# Altium PCB DC_Buck_5V.PcbDoc
Units mm, origin at the board's own origin, x right, y up, seen from the top; angles counter-clockwise.
Board outline 250 x 250 mm, 2 copper layers (Top Layer, Bottom Layer); 37 components, 22 nets, 92 pads, 116 vias.
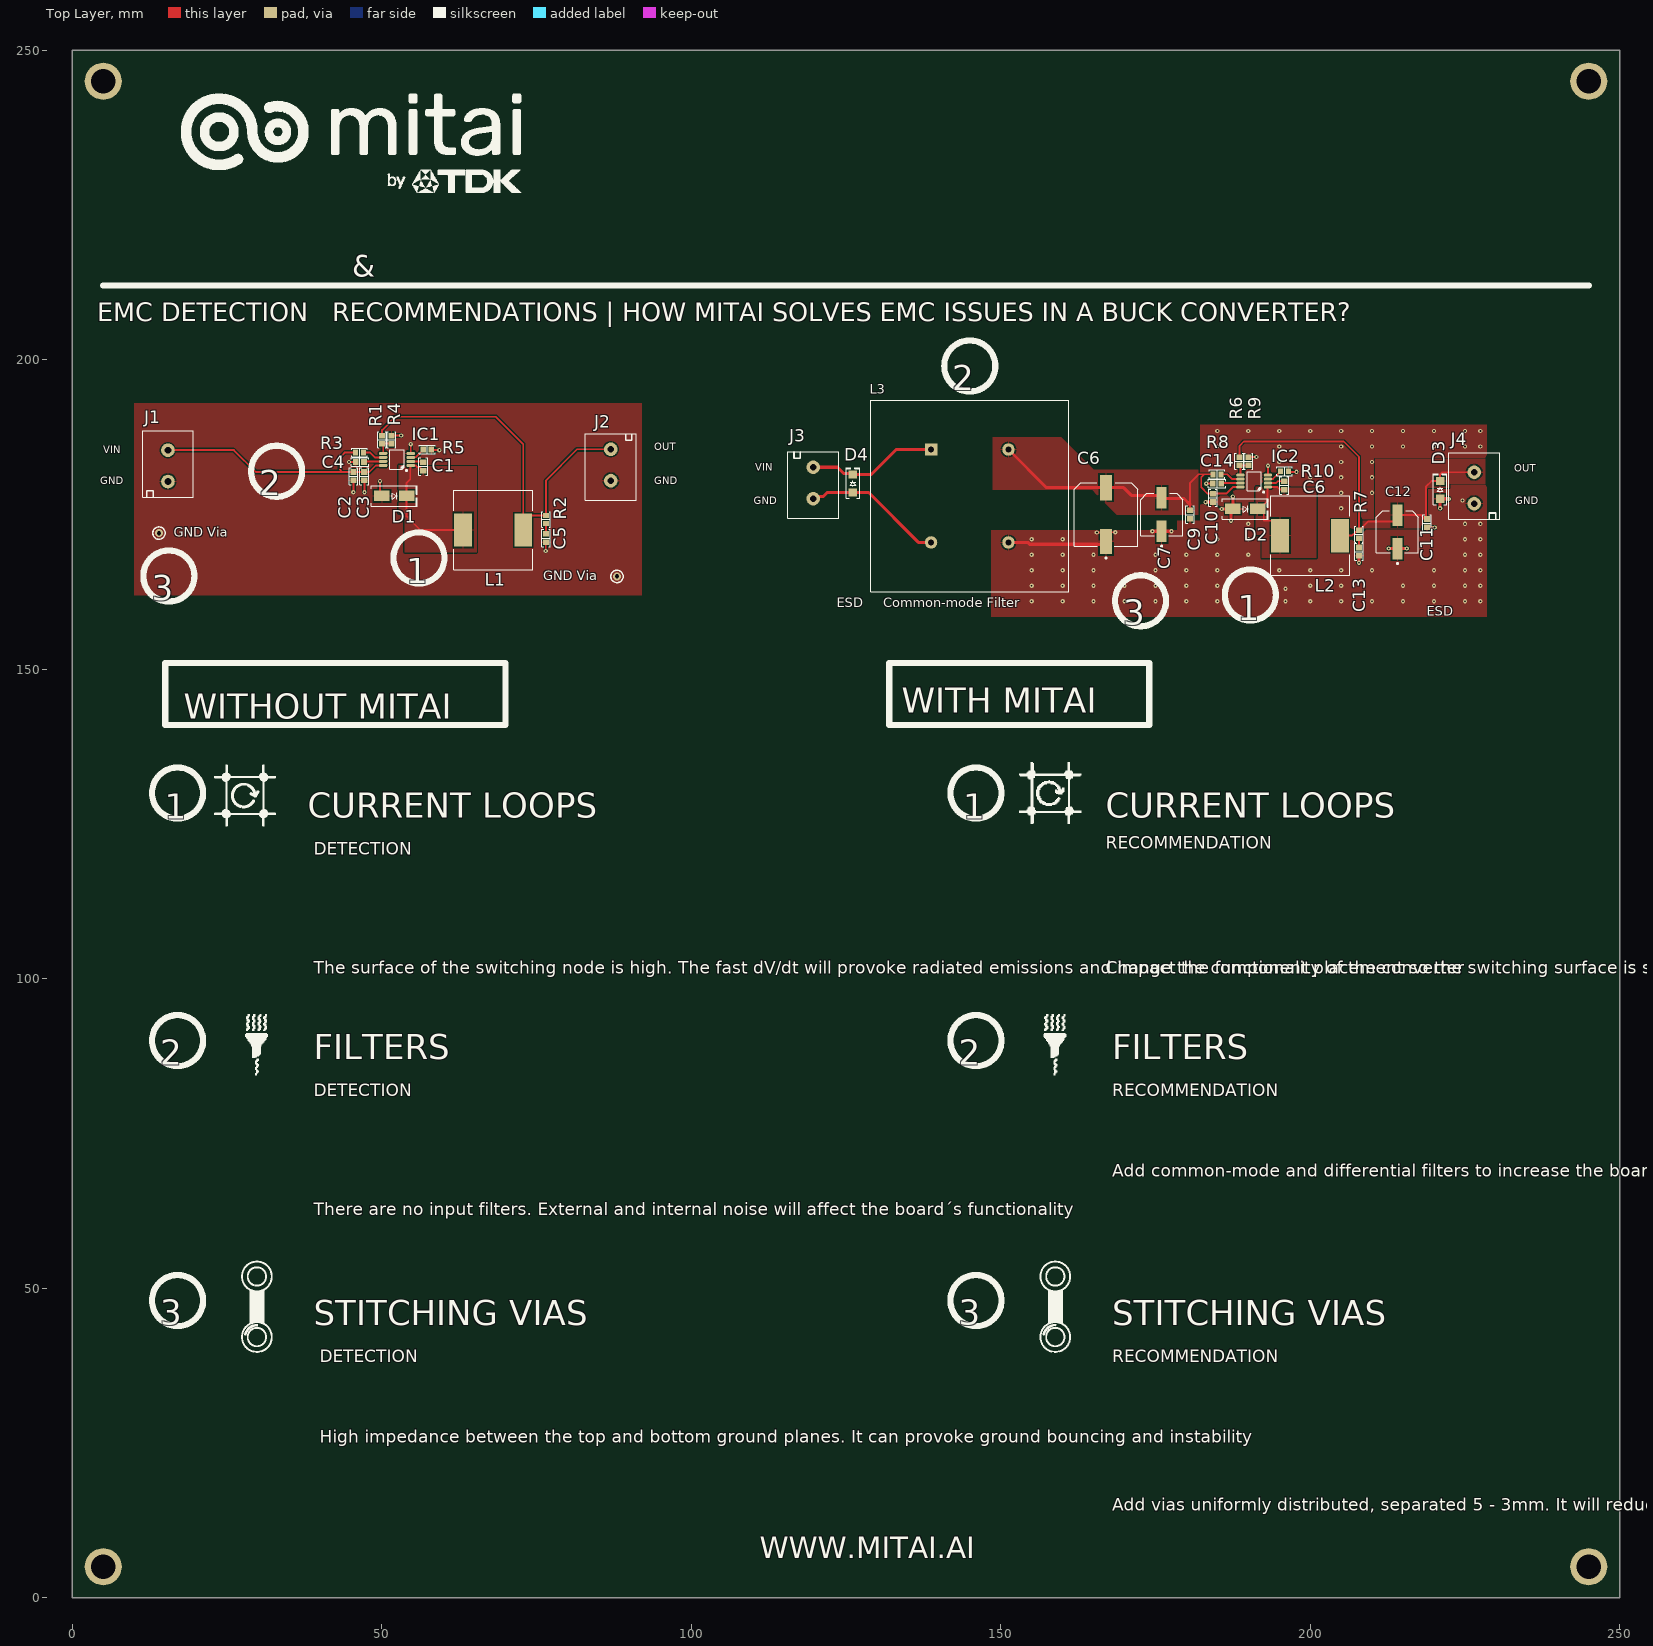
[diagram p0: Top Layer view]
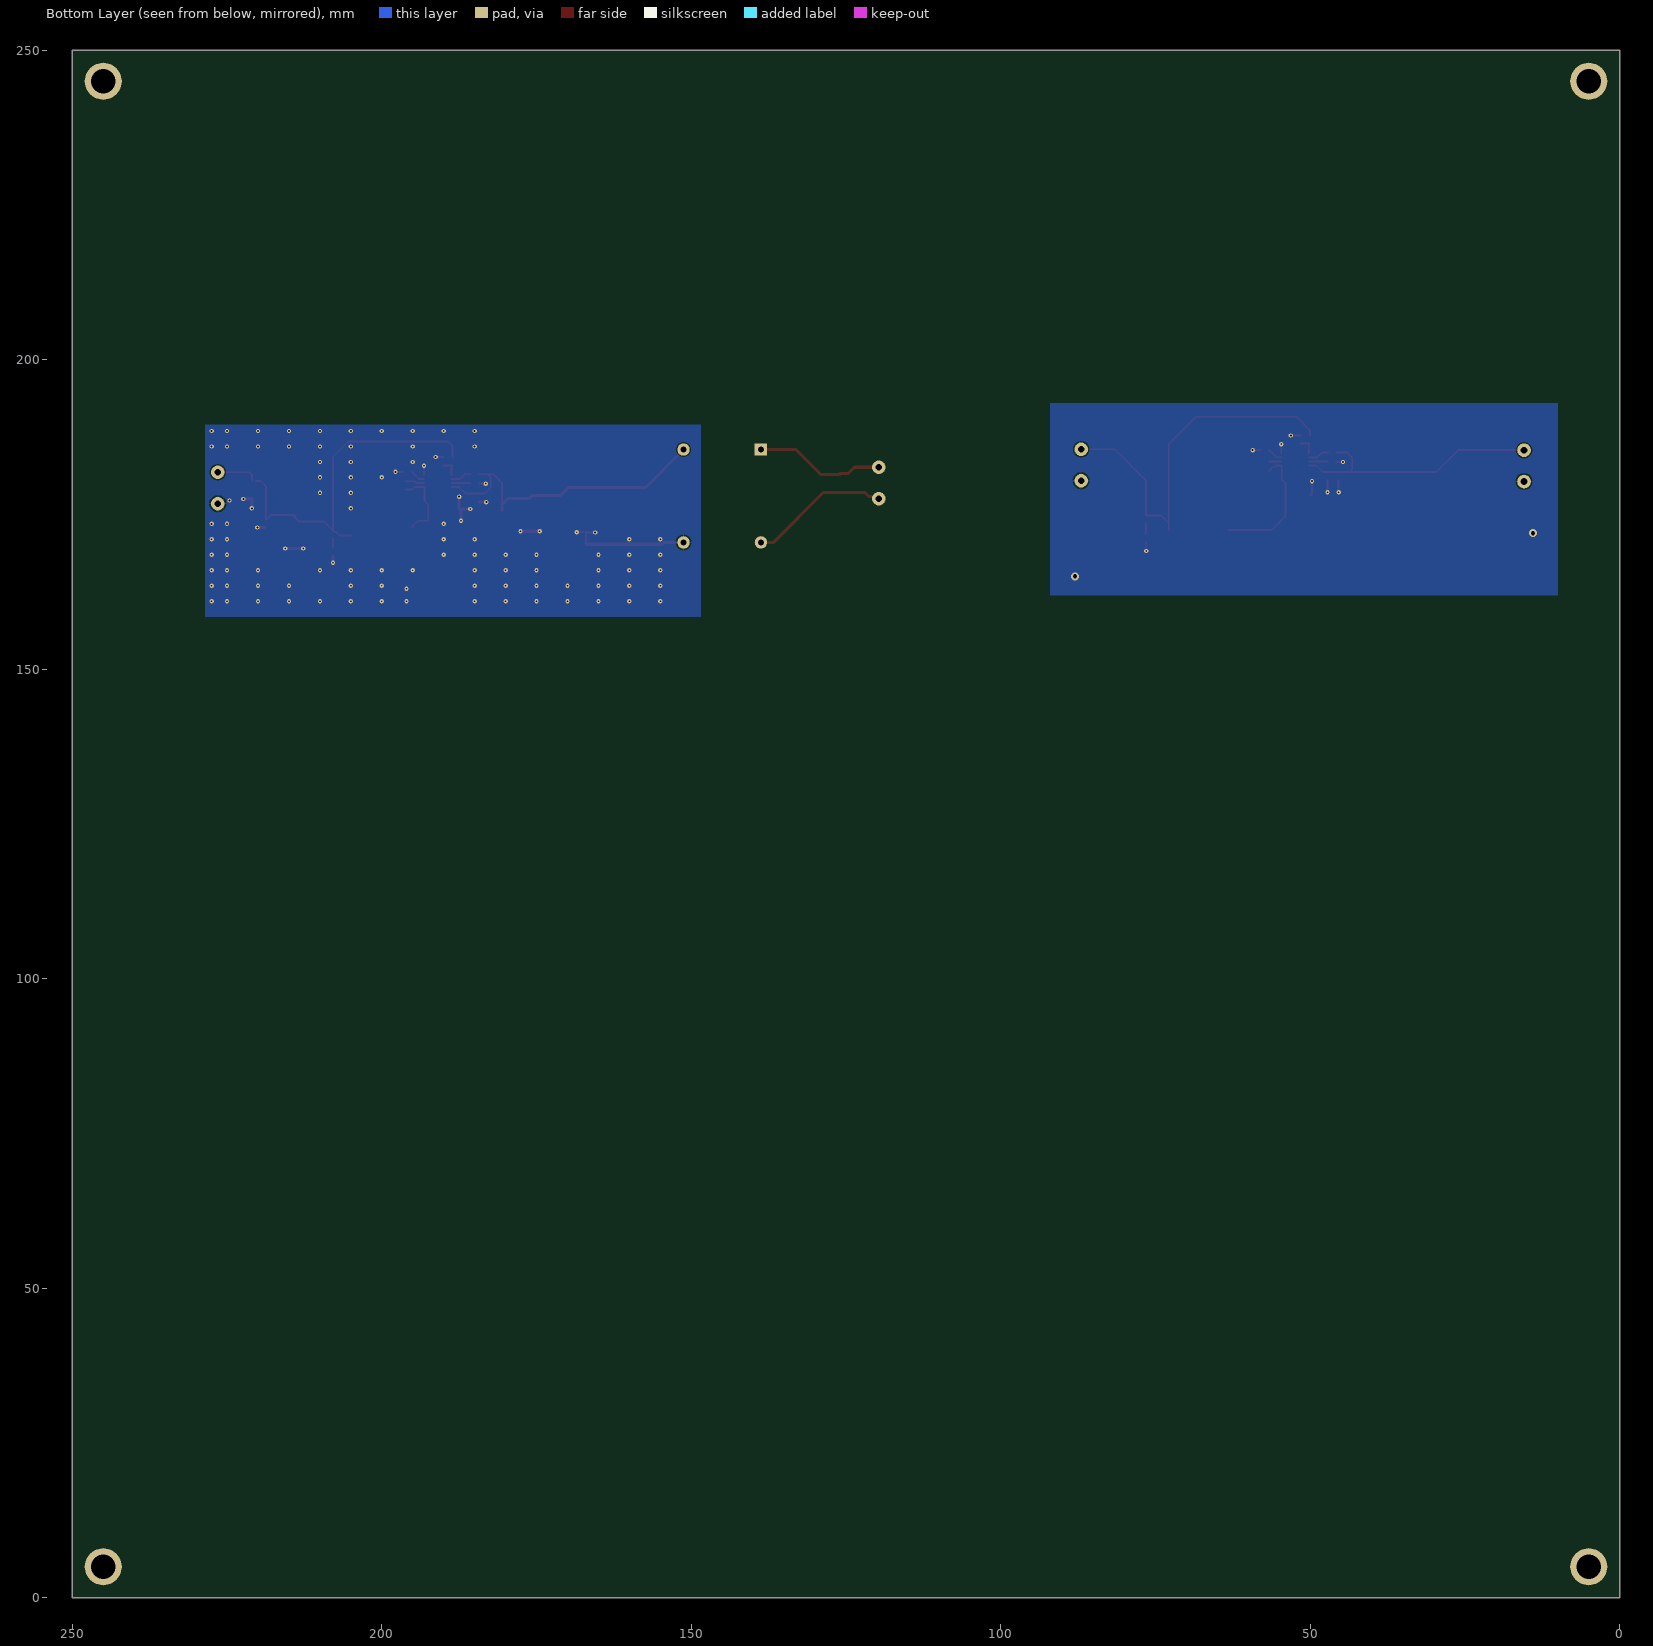
[diagram p1: Bottom Layer view, seen from below]
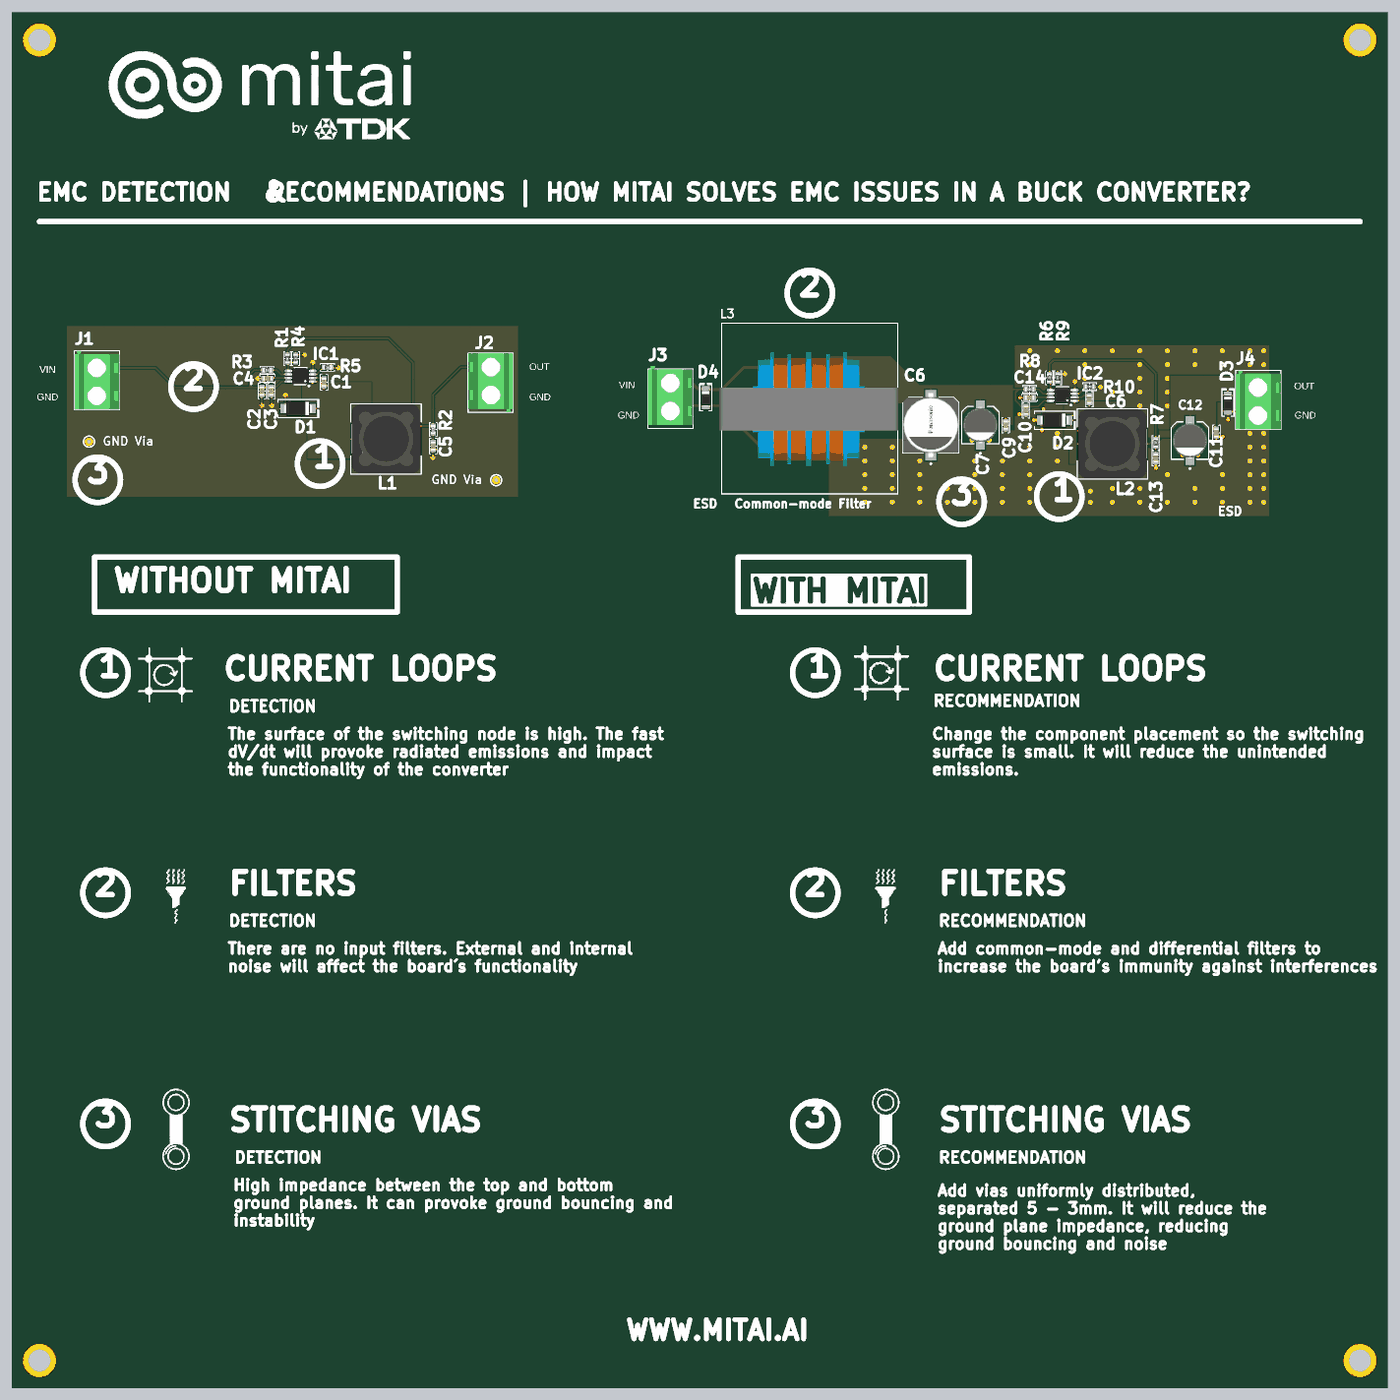
[diagram p2: 3D render of the assembled board from above, using the file's embedded part models]

## Layer stack, top to bottom
Top Solder: solder mask 0.0102, Solder Resist, Dk 3.5
Top Layer: signal copper 0.0356
Dielectric 1: dielectric 0.32, FR-4, Dk 4.8
Bottom Layer: signal copper 0.0356
Bottom Solder: solder mask 0.0102, Solder Resist, Dk 3.5

## Board outline
0,0 250,0 250,250 0,250

## Design rules (kind name [scope] priority, off if disabled: settings)
Clearance [All] p1: gap=0.2 ignorepadtopadclearanceinfootprint=TRUE except(0: Arc-Hole Track-Hole SMDPad-Hole THPad-Hole Via-Hole Fill-Hole Poly-Hole Region-Hole Text-Hole)
HoleSize [All] p1: absolutevalues=TRUE maxlimit=7 minlimit=0.025 maxpercent=80.000 minpercent=20.000
PlaneConnect [All] p1: pad.planeconnectstyle=Relief pad.reliefexpansion=0.508 pad.reliefentries=4 pad.reliefconductorwidth=0.254 pad.reliefairgap=0.254 via.planeconnectstyle=Direct via.reliefexpansion=0.508 via.reliefentries=4 via.reliefconductorwidth=0.254 via.reliefairgap=0.254
PolygonConnect [All] p1: thpad.connectstyle=Relief thpad.reliefconductorwidth=0.254 thpad.reliefentries=4 thpad.polygonreliefangle="90 Angle" thpad.airgapwidth=0.254 smdpad.connectstyle=Relief smdpad.reliefconductorwidth=0.254 smdpad.reliefentries=4 smdpad.polygonreliefangle="90 Angle" smdpad.airgapwidth=0.254 via.connectstyle=Direct via.reliefconductorwidth=0.254 via.reliefentries=4 via.polygonreliefangle="90 Angle" via.airgapwidth=0.254
RoutingVias [All] p1: holewidth=0.3 width=0.7 viastyle="Through Hole" minholewidth=0.3 minwidth=0.7 maxholewidth=0.3 maxwidth=0.7
SolderMaskExpansion [All] p1: expansion=0.102 istentingtop=FALSE
Width [All] p1: maxlimit=0.5 minlimit=0.2 preferedwidth=0.3 minimp=50.000000 maximp=50.000000 favimp=50.000000
28 further rules are at their usual default settings.

## Classes and differential pairs
net class R10_Nets: GND2 RCL2
net class R9_Nets: FB2 GND2
net class R8_Nets: VCC2 VIN2
net class R7_Nets: NetC13_2 OUT2
net class R6_Nets: FB2 OUT2
net class L3_Nets: GND2 NetD4_1 NetD4_2 VIN2
net class L2_Nets: OUT2 SW2
net class J4_Nets: GND2 OUT2
net class J3_Nets: NetD4_1 NetD4_2
net class IC2_Nets: BST2 FB2 GND2 RCL2 RON2 SW2 VCC2 VIN2
net class D4_Nets: NetD4_1 NetD4_2
net class D3_Nets: GND2 OUT2
net class D2_Nets: GND2 SW2
net class C14_Nets: GND2 RON2
net class C13_Nets: GND2 NetC13_2
net class C12_Nets: GND2 OUT2
net class C11_Nets: GND2 OUT2
net class C10_Nets: GND2 VIN2
net class C9_Nets: GND2 VIN2
net class C7_Nets: GND2 VIN2
net class C6_Nets: BST2 GND2 SW2 VIN2
net class R5_Nets: GND1 RCL1
net class R4_Nets: FB1 GND1
net class R3_Nets: SD1 VIN1
net class R2_Nets: NetC5_2 OUT1
net class R1_Nets: FB1 OUT1
net class L1_Nets: OUT1 SW1
net class IC1_Nets: BST1 FB1 GND1 RCL1 SD1 SW1 VCC1 VIN1
net class D1_Nets: GND1 SW1
net class C5_Nets: GND1 NetC5_2
net class C4_Nets: GND1 VCC1
net class C3_Nets: GND1 VIN1
net class C2_Nets: GND1 VIN1
net class C1_Nets: BST1 SW1
net class J2_Nets: GND1 OUT1
net class J1_Nets: GND1 VIN1

## Components (designator, comment, footprint, x,y, rotation, side; value= is the part's Value field where it differs from the comment)
C1 "10000 pF" "CAP 0603_1608" 56.7,182.775 r270 top
C2 "1 µF" "CAP 0603_1608" 45.45,181.2 r90 top
C3 "0.1 µF" "CAP 0603_1608" 47.15,181.2 r90 top
C4 "0.1 µF" "CAP 0603_1608" 46.45,183.5 r180 top
C5 "15 µF" "CAP 0603_1608" 76.55,171.2 r90 top
C6 "EEE-FC1H221P" FP-FC-G-MFG 167,175 r90 top
C6 "10000 pF" "CAP 0603_1608" 195.8,179.7 r270 top
C7 "UUT1H100MCL1GS" FP-UUT1H100MCL1GS-MFG 176,175 r90 top
C9 "1 µF" "CAP 0603_1608" 180.6,175 r90 top
C10 "0.1 µF" "CAP 0603_1608" 184.3,177.7 r90 top
C11 "0.1 µF" "CAP 0603_1608" 218.9,173.6 r90 top
C12 "UUT1H100MCL1GS" FP-UUT1H100MCL1GS-MFG 214.1,172.2 r90 top
C13 "15 µF" "CAP 0603_1608" 207.9,169 r90 top
C14 "0.1 µF" "CAP 0603_1608" 184.95,180 r180 top
D1 "MURA110T3G" "DO214AC SMA" 52,178 r0 top
D2 "MURA110T3G" "DO214AC SMA" 189.5,175.9 r0 top
D3 "SMF33A-E3-08" "SMF DO-219AB" 221,179 r90 top
D4 "SMF33A-E3-08" "SMF DO-219AB" 126.1,180 r90 top
IC1 "LM5008MMX/NOPB" "TI VSSOP-8 DGK" 52.45,183.9 r180 top
IC2 "LM5008MMX/NOPB" "TI VSSOP-8 DGK" 190.95,180.4 r180 top
J1 "282837-2" "TE 282837-2" 15.45,182.86 r90 top
J2 "282837-2" "TE 282837-2" 87,183 r270 top
J3 "282837-2" "TE 282837-2" 119.7,180.1 r270 top
J4 "282837-2" "TE 282837-2" 226.5,179.29 r90 top
L1 "39 µH" "BOURNS SRR1280" 68,172.5 r0 top
L2 "39 µH" "BOURNS SRR1280" 200,171.6 r0 top
L3 "Choke Alt" B82732R2112B30 145,178 r0 top value="6.8 mH 3.2 85mΩ"
R1 "1 kOhms" "RES 0603_1608" 50.05,187.1 r90 top
R2 "2 Ohms" "RES 0603_1608" 76.55,174.2 r90 top
R3 "76.8 kOhms" "RES 0603_1608" 46.4,185 r180 top
R4 "1 kOhms" "RES 0603_1608" 51.55,187.1 r270 top
R5 "267 kOhms" "RES 0603_1608" 57.35,185.5 r180 top
R6 "1 kOhms" "RES 0603_1608" 188.55,183.6 r90 top
R7 "2 Ohms" "RES 0603_1608" 207.9,171.8 r90 top
R8 "76.8 kOhms" "RES 0603_1608" 184.95,181.5 r180 top
R9 "1 kOhms" "RES 0603_1608" 190.05,183.6 r270 top
R10 "267 kOhms" "RES 0603_1608" 195.85,182 r180 top

## Footprints (in the part's own frame and the unit in brackets; to place one, negate y for a bottom-side part, rotate by r counter-clockwise, add the part's x,y. Pads: shape width x height; smd on the part's side, far side on the other; paste and mask are expansions set on the pad)
B82732R2112B30 [mm] "D CORE DBL CHOKE 15MH 1.1A VERT"
  rect 2x2 hole 1: 1(-6.25,7.5)
  round 2 hole 1: 2(-6.25,-7.5) 3(6.25,-7.5) 4(6.25,7.5)
  silkscreen extent -16,-15.5 16,15.5, body extent -16.45,-10.4 16.05,10.2, height 30
"BOURNS SRR1280" [mm]
  rect 2.9x5.4 smd: 1(-4.85,0) 2(4.85,0)
  silkscreen extent -6.4,-6.4 6.4,6.4, body extent -6.25,-6.25 6.25,6.25, height 7.9
"CAP 0603_1608" [mm]
  rect 0.9x1 smd: 1(-0.675,0) 2(0.675,0)
  silkscreen extent -1.4,-0.7 1.4,0.7, body extent -0.8,-0.41 0.8,0.41, height 0.82
"DO214AC SMA" [mm]
  rect 2.5x1.7 smd: 1(-2,0) 2(2,0)
  silkscreen extent -3.68,-1.65 3.75,1.65, body extent -2.6,-1.37 2.6,1.37, height 2.4
FP-FC-G-MFG [mm]
  rect 4.1x2 smd paste+0 mask+0: 1(-4.35,0) 2(4.35,0)
  silkscreen extent -7.15,-5.1 5.1,5.1, body extent -6.65,-5.35 6.65,5.35, height 0.25
FP-UUT1H100MCL1GS-MFG [mm]
  rect 3.5x1.6 smd paste+0 mask+0: 1(-2.7,0) 2(2.7,0)
  silkscreen extent -5.22,-3.4 3.4,3.4, body extent -4.7,-3.65 4.7,3.65, height 0.25
"RES 0603_1608" [mm]
  rect 0.85x0.95 smd: 1(-0.65,0) 2(0.65,0)
  silkscreen extent -1.27,-0.7 1.27,0.7, body extent -0.8,-0.4 0.8,0.4, height 0.45
"SMF DO-219AB" [mm] "Molded Diode, 2-Leads, Body 3.90x1.90mm, IPC Medium Density"
  rect 1.3x1.4 smd: 1(-1.45,0) 2(1.45,0)
  silkscreen extent -2.4,-1.1 2.59,1.1, body extent -1.5,-0.9 1.5,0.9, height 1.18
"TE 282837-2" [mm]
  round 2.2 hole 1.1: 1(-2.54,0) 2(2.54,0)
  silkscreen extent -5.08,-4.1 5.68,4.1, body extent -5.08,-4.1 5.68,4.1, height 10.3
"TI VSSOP-8 DGK" [mm]
  oval 1.35x0.5 smd: 1(-2.225,0.975) 2(-2.225,0.325) 3(-2.225,-0.325) 4(-2.225,-0.975) 5(2.225,-0.975) 6(2.225,-0.325) 7(2.225,0.325) 8(2.225,0.975)
  silkscreen extent -1.65,-1.55 1.15,1.9, body extent -2.45,-1.5 2.45,1.5, height 1.1

## Part data
C1 C6: library part AC0603KRX7R0BB103, "CAP CER 10000PF 100V X7R 0603", Device Package="0603 (1608 Metric)", Manufacturer=Yageo, Operating Temperature="-55°C ~ 125°C", Ratings=AEC-Q200, Supplier Part Number 1=311-3100-1-ND, Temperature Coefficient=X7R, Tolerance=±10%, Voltage - Rated=100V, Applications=Automotive, Capacitance="10000 pF", ComponentLink1Description=Datasheet, ComponentLink1URL=http://www.yageo.com/NewPortal/_en/search/productDocs.jsp?YageoPartNumber=AC0603KRX7R0BB103, ComponentLink2Description="DigiKey Link", ComponentLink2URL=https://www.digikey.com/en/products/detail/yageo/AC0603KRX7R0BB103/6643086, lastupdated="01/10/2023 19:09:12", Lifecycle Status=Active, Minimum Order=1, Mounting Type="Surface Mount, MLCC", Package / Case="0603 (1608 Metric)", Packaging=TapeAndReel, Part Number=AC0603KRX7R0BB103, Part Status=Active, PartId=2218, Price=0.01, Series=AC, Size / Dimension="0.063\" L x 0.031\" W (1.60mm x 0.80mm)", Supplier 1=DigiKey, Thickness (Max)="0.035\" (0.90mm)"
C2 C9: library part UMK107ABJ105MAHT, "CAP CER 1UF 50V X5R 0603", Device Package="0603 (1608 Metric)", Manufacturer="Taiyo Yuden", Operating Temperature="-55°C ~ 85°C", Ratings=AEC-Q200, Supplier Part Number 1=587-4958-1-ND, Temperature Coefficient=X5R, Tolerance=±20%, Voltage - Rated=50V, Applications="Automotive, SMPS Filtering", Capacitance="1 µF", ComponentLink1Description=Datasheet, ComponentLink1URL=https://www.yuden.co.jp/productdata/catalog/mlcc_all_hq_e.pdf, ComponentLink2Description="DigiKey Link", ComponentLink2URL=https://www.digikey.com/en/products/detail/taiyo-yuden/UMK107ABJ105MAHT/6563551, lastupdated="01/10/2023 19:09:10", Lifecycle Status=Active, Minimum Order=1, Mounting Type="Surface Mount, MLCC", Package / Case="0603 (1608 Metric)", Packaging=TapeAndReel, Part Number=UMK107ABJ105MAHT, Part Status=Active, PartId=3194, Price=0.03, Series=M, Size / Dimension="0.063\" L x 0.031\" W (1.60mm x 0.80mm)", Supplier 1=DigiKey, Thickness (Max)="0.037\" (0.95mm)"
C3 C4 C10 C11 C14: library part C0603C104K5RAC7411, "CAP CER 0.1UF 50V X7R 0603", Device Package="0603 (1608 Metric)", Manufacturer=KEMET, Operating Temperature="-55°C ~ 125°C", Supplier Part Number 1=399-C0603C104K5RAC7411CT-ND, Temperature Coefficient=X7R, Tolerance=±10%, Voltage - Rated=50V, Applications="Bypass, Decoupling", Capacitance="0.1 µF", ComponentLink1Description=Datasheet, ComponentLink1URL=https://api.kemet.com/component-edge/download/datasheet/C0603C104K5RAC7411.pdf, ComponentLink2Description="DigiKey Link", ComponentLink2URL=https://www.digikey.com/en/products/detail/kemet/C0603C104K5RAC7411/3317013, lastupdated="01/10/2023 19:09:12", Lifecycle Status=Active, Minimum Order=1, Mounting Type="Surface Mount, MLCC", Package / Case="0603 (1608 Metric)", Packaging=TapeAndReel, Part Number=C0603C104K5RAC7411, Part Status=Active, PartId=2233, Price=0.01, Series="SMD Comm X7R", Size / Dimension="0.063\" L x 0.031\" W (1.60mm x 0.80mm)", Supplier 1=DigiKey, Thickness (Max)="0.035\" (0.90mm)"
C5 C13: library part C1608X5R0J156M080AC, "CAP CER 15UF 6.3V X5R 0603", Device Package="0603 (1608 Metric)", Manufacturer="TDK Corporation", Operating Temperature="-55°C ~ 85°C", Supplier Part Number 1=445-8027-1-ND, Temperature Coefficient=X5R, Tolerance=±20%, Voltage - Rated=6.3V, Applications="General Purpose", Capacitance="15 µF", ComponentLink1Description=Datasheet, ComponentLink1URL=https://product.tdk.com/info/en/catalog/datasheets/mlcc_commercial_general_en.pdf?ref_disty=digikey, ComponentLink2Description="DigiKey Link", ComponentLink2URL=https://www.digikey.com/en/products/detail/tdk-corporation/C1608X5R0J156M080AC/2792253, Features="Low ESL", lastupdated="01/10/2023 19:09:11", Lifecycle Status=Active, Minimum Order=1, Mounting Type="Surface Mount, MLCC", Package / Case="0603 (1608 Metric)", Packaging=TapeAndReel, Part Number=C1608X5R0J156M080AC, Part Status=Active, PartId=2610, Price=0.07, Series=C, Size / Dimension="0.063\" L x 0.031\" W (1.60mm x 0.80mm)", Supplier 1=DigiKey, Thickness (Max)="0.039\" (1.00mm)"
C6: library part CMP-05427-002161-1, "CAP ALUM 220UF 20% 50V SMD", Capacitance=220uF, Case/Package=Radial, ESR (Equivalent Series Resistance)=300mR, Leakage Current=3uA, Max Operating Temperature=105°C, Min Operating Temperature=-40°C, Package Quantity=500, Ratings=AEC-Q200, Ripple Current=500mA, Tolerance=20%, Voltage=50V, Construction=Cylindrical, Contact Plating=Tin, Diameter=10mm, Height=10.2mm, Height - Seated (Max)=0.402inch, Impedance=300mR, Lead Free="Lead Free", Length=10.5mm, Life (Hours)=1000Hour, Material=Aluminium, Mount="Surface Mount", Packaging="Tape and Reel", Radiation Hardening=No, Reach SVHC Compliant=Yes, Ripple Current (AC)=500mA, RoHS Compliant=Yes, Series=FC, Termination=SMD/SMT, Voltage Rating=50V, Voltage Rating (DC)=50V, Width=900um
C7 C12: library part CMP-12462-000014-1, "CAP ALUM 10UF 20% 50V SMD", Capacitance=10uF, Case/Package=SMD/SMT, Dielectric Material=Aluminium, Leakage Current=3uA, Max Operating Temperature=105°C, Min Operating Temperature=-55°C, Package Quantity=1, Ripple Current=30mA, Tolerance=20%, Voltage=50V, Diameter=6.3mm, Dissipation Factor=0.12%, Features="General Purpose", Height=5.8mm, Height - Seated (Max)=0.24inch, Lead Diameter=0.8mm, Lead Free="Lead Free", Lead Pitch=2.2mm, Length=5.8mm, Life (Hours)=2000Hour, Mount="Surface Mount", Number of Pins=2, Packaging="Tape and Reel", Radiation Hardening=No, REACH SVHC="No SVHC", Ripple Current (AC)=30mA, Termination=SMD/SMT, Voltage Rating=50V, Voltage Rating (DC)=50V, Width=6.6mm
D1 D2: "DIODE GEN PURP 100V 2A SMA", Current - Average Rectified (Io)=2A, Current - Reverse Leakage @ Vr="2µA @ 100V", Manufacturer="ON Semiconductor", Operating Temperature - Junction="-65°C ~ 175°C", Package / Case="DO-214AC, SMA", Supplier Device Package=SMA, Supplier Part Number 1=MURA110T3GOSCT-ND, Voltage - DC Reverse (Vr) (Max)=100V, Voltage - Forward (Vf) (Max) @ If="875mV @ 1A", ComponentLink1Description=Datasheet, ComponentLink1URL=//media.digikey.com/pdf/Data%20Sheets/ON%20Semiconductor%20PDFs/MURA105T3-D.pdf, ComponentLink2Description="DigiKey Link", ComponentLink2URL=http://digikey.com/product-detail/en/on-semiconductor/MURA110T3G/MURA110T3GOSCT-ND/964568, Diode Type=Standard, lastupdated="01/10/2023 20:19:19", Lifecycle Status=Active, Minimum Order=1, Mounting Type="Surface Mount", Packaging=TapeAndReel, Part Number=MURA110T3G, Part Status=Active, PartId=641, Price=0.10, Reverse Recovery Time (trr)=30ns, Series=-, Speed="Fast Recovery =< 500ns, > 200mA (Io)", Supplier 1=DigiKey
D3 D4: "TVS DIODE 33V 53.3V SMF", Capacitance @ Frequency="198pF @ 1MHz", Current - Peak Pulse (10/1000µs)=3.8A, Manufacturer="Vishay Semiconductor Diodes Division", Operating Temperature="-65°C ~ 175°C (TJ)", Package / Case=DO-219AB, Power - Peak Pulse=200W, Power Line Protection=No, Supplier Device Package=SMF, Supplier Part Number 1=SMF33A-E3-08CT-ND, Voltage - Breakdown (Min)=36.7V, Voltage - Clamping (Max) @ Ipp=53.3V, Voltage - Reverse Standoff (Typ)=33V, Applications="General Purpose", ComponentLink1Description=Datasheet, ComponentLink1URL=http://www.vishay.com/docs/85881/smf5v0atosmf58a.pdf, ComponentLink2Description="DigiKey Link", ComponentLink2URL=http://digikey.com/product-detail/en/vishay-semiconductor-diodes-division/SMF33A-E3-08/SMF33A-E3-08CT-ND/1680634, lastupdated="29/10/2023 20:46:48", Lifecycle Status=Active, Minimum Order=1, Mounting Type="Surface Mount", Packaging=TapeAndReel, Part Number=SMF33A-E3-08, Part Status=Active, PartId=5501, Price=0.10, Series=-, Supplier 1=DigiKey, Type=Zener, Unidirectional Channels=1
IC1 IC2: "IC REG BUCK ADJ 350MA 8VSSOP", Current - Output=350mA, Device Package="8-TSSOP, 8-MSOP (0.118\", 3.00mm Width)", Frequency - Switching="50kHz ~ 600kHz", Manufacturer="Texas Instruments", Operating Temperature="-40°C ~ 125°C (TJ)", Supplier Device Package=8-VSSOP, Supplier Part Number 1=296-35288-2-ND, Voltage - Input (Max)=95V, Voltage - Input (Min)=9.5V, Voltage - Output (Max)=75V, Voltage - Output (Min/Fixed)=2.5V, ComponentLink1Description=Datasheet, ComponentLink1URL=http://www.ti.com/general/docs/suppproductinfo.tsp?distId=10&gotoUrl=http%3A%2F%2Fwww.ti.com%2Flit%2Fgpn%2Flm5008, ComponentLink2Description="DigiKey Link", ComponentLink2URL=//digikey.com/product-detail/en/texas-instruments/LM5008MMX-NOPB/296-35288-2-ND/1871803, Function=Step-Down, lastupdated="12/12/2019 10:27:36", Lifecycle Status=0, Minimum Order=1, Mounting Type="Surface Mount", Number of Outputs=1, Output Configuration=Positive, Output Type=Adjustable, Package / Case="8-TSSOP, 8-MSOP (0.118\", 3.00mm Width)", Packaging=TapeAndReel, Part Number=LM5008MMX/NOPB, Part Status=Active, Price=1.30, Series=-, Supplier 1=DigiKey, Synchronous Rectifier=No, Topology=Buck
J1 J2 J3 J4: "TERM BLK 2P SIDE ENT 5.08MM PCB", Color=Green, Current="13.5 A", Manufacturer="TE Connectivity AMP Connectors", Supplier Part Number 1=A113320-ND, Voltage="300 V", ComponentLink1Description=Datasheet, ComponentLink1URL=https://www.te.com/commerce/DocumentDelivery/DDEController?Action=srchrtrv&DocNm=282837&DocType=Customer+Drawing&DocLang=English, ComponentLink2Description="DigiKey Link", ComponentLink2URL=https://www.digikey.com/en/products/detail/te-connectivity-amp-connectors/282837-2/2187973, Features="Interlocking (Side)", lastupdated="21/06/2022 15:00:23", Lifecycle Status=Active, Mating Orientation="Horizontal with Board", Minimum Order=1, Mounting Type="Through Hole", Number of Levels=1, Packaging=Tray, Part Number=282837-2, Part Status=Active, Pitch="0.200\" (5.08mm)", Positions Per Level=2, Price=0.31, Series=Buchanan, Supplier 1=DigiKey, Wire Gauge="16-28 AWG", Wire Termination="Screw - Rising Cage Clamp"
L1 L2: library part SRR1280-390M, "FIXED IND 39UH 3.2A 70 MOHM SMD", Current - Saturation=3.1A, Current Rating (Amps)="3.2 A", DC Resistance (DCR)="70mOhm Max", Device Package=Nonstandard, Frequency - Self Resonant=8.5MHz, Inductance Frequency - Test="100 kHz", Manufacturer="Bourns Inc.", Operating Temperature="-40°C ~ 125°C", Q @ Freq="24 @ 2.52MHz", Supplier Part Number 1=118-SRR1280-390MCT-ND, Tolerance=±20%, ComponentLink1Description=Datasheet, ComponentLink1URL=https://www.bourns.com/docs/Product-Datasheets/SRR1280.pdf, ComponentLink2Description="DigiKey Link", ComponentLink2URL=https://www.digikey.com/en/products/detail/bourns-inc/SRR1280-390M/1969999, Height - Seated (Max)="0.315\" (8.00mm)", Inductance="39 µH", lastupdated="01/10/2023 20:27:20", Lifecycle Status=Active, Material - Core=Ferrite, Minimum Order=1, Mounting Type="Surface Mount", Package / Case=Nonstandard, Packaging=TapeAndReel, Part Number=SRR1280-390M, Part Status=Active, PartId=15, Price=0.51, Series=SRR1280, Shielding=Shielded, Size / Dimension="0.492\" L x 0.492\" W (12.50mm x 12.50mm)", Supplier 1=DigiKey, Type="Drum Core, Wirewound"
L3: library part B82734R2322B030, Current=3.2, Inductance="6.8 mH", Manufacturer=TDK, Supplier Part Number 1=871-B82734R2322B30, Temp_ Max=40, Temp_ Min=0, OrderingCode=B82734R2322B030, Part Number=B82734R2322B030, Rdc=85m, Supplier 1=Mouser, Supplier 2=Farnell, Supplier Part Number 2=1219129
R1 R4 R6 R9: library part AT0603DRD071KL, "RES SMD 1K OHM 0.5% 1/10W 0603", Device Package="0603 (1608 Metric)", Manufacturer=Yageo, Operating Temperature="-55°C ~ 155°C", Power (Watts)="0.1W, 1/10W", Ratings=AEC-Q200, Supplier Device Package=0603, Supplier Part Number 1=YAG2115CT-ND, Temperature Coefficient=±25ppm/°C, Tolerance=±0.5%, ComponentLink1Description=Datasheet, ComponentLink1URL=http://www.yageo.com/documents/recent/PYu-AT_51_RoHS_L_5.pdf, ComponentLink2Description="DigiKey Link", ComponentLink2URL=https://www.digikey.com/en/products/detail/yageo/AT0603DRD071KL/5138634, Composition="Thin Film", Features="Anti-Sulfur, Automotive AEC-Q200, Moisture Resistant", Height - Seated (Max)="0.022\" (0.55mm)", lastupdated="01/10/2023 19:35:39", Lifecycle Status=Active, Minimum Order=1, Number of Terminations=2, Package / Case="0603 (1608 Metric)", Packaging=TapeAndReel, Part Number=AT0603DRD071KL, Part Status=Active, PartId=4899, Price=0.02, Resistance="1 kOhms", Series=AT, Size / Dimension="0.063\" L x 0.031\" W (1.60mm x 0.80mm)", Supplier 1=DigiKey
R2 R7: library part SFR03EZPJ2R0, "SULFUR TOLERANT CHIP RESISTORS", Device Package="0603 (1608 Metric)", Manufacturer="Rohm Semiconductor", Operating Temperature="-55°C ~ 155°C", Power (Watts)="0.1W, 1/10W", Ratings=AEC-Q200, Supplier Device Package=0603, Supplier Part Number 1=511-SFR03EZPJ2R0CT-ND, Temperature Coefficient=±400ppm/°C, Tolerance=±5%, ComponentLink1Description=Datasheet, ComponentLink1URL=https://fscdn.rohm.com/en/products/databook/datasheet/passive/resistor/chip_resistor/sfr-e.pdf, ComponentLink2Description="DigiKey Link", ComponentLink2URL=https://www.digikey.com/en/products/detail/rohm-semiconductor/SFR03EZPJ2R0/16179956, Composition="Thick Film", Features="Anti-Sulfur, Automotive AEC-Q200", Height - Seated (Max)="0.022\" (0.55mm)", lastupdated="01/10/2023 19:33:15", Lifecycle Status=Active, Minimum Order=1, Number of Terminations=2, Package / Case="0603 (1608 Metric)", Packaging=TapeAndReel, Part Number=SFR03EZPJ2R0, Part Status=Active, PartId=68512, Price=0.01, Resistance="2 Ohms", Series=SFR, Size / Dimension="0.063\" L x 0.031\" W (1.60mm x 0.80mm)", Supplier 1=DigiKey
R3 R8: library part RG1608P-7682-B-T5, "RES SMD 76.8KOHM 0.1% 1/10W 0603", Device Package="0603 (1608 Metric)", Manufacturer=Susumu, Operating Temperature="-55°C ~ 155°C", Power (Watts)="0.1W, 1/10W", Ratings=AEC-Q200, Supplier Device Package=0603, Supplier Part Number 1=RG16P76.8KBCT-ND, Temperature Coefficient=±25ppm/°C, Tolerance=±0.1%, ComponentLink1Description=Datasheet, ComponentLink1URL=//media.digikey.com/pdf/Data%20Sheets/Susumu%20PDFs/RG_RM_RGH_Oct2012.pdf, ComponentLink2Description="DigiKey Link", ComponentLink2URL=https://www.digikey.com/en/products/detail/susumu/RG1608P-7682-B-T5/1240630, Composition="Thin Film", Features="Anti-Sulfur, Automotive AEC-Q200", Height - Seated (Max)="0.020\" (0.50mm)", lastupdated="01/10/2023 19:35:32", Lifecycle Status=Active, Minimum Order=1, Number of Terminations=2, Package / Case="0603 (1608 Metric)", Packaging=TapeAndReel, Part Number=RG1608P-7682-B-T5, Part Status=Active, PartId=6774, Price=0.05, Resistance="76.8 kOhms", Series=RG, Size / Dimension="0.063\" L x 0.031\" W (1.60mm x 0.80mm)", Supplier 1=DigiKey
R5 R10: library part RT0603BRD07267KL, "RES SMD 267K OHM 0.1% 1/10W 0603", Device Package="0603 (1608 Metric)", Manufacturer=Yageo, Operating Temperature="-55°C ~ 155°C", Power (Watts)="0.1W, 1/10W", Supplier Device Package=0603, Supplier Part Number 1=YAG4514CT-ND, Temperature Coefficient=±25ppm/°C, Tolerance=±0.1%, ComponentLink1Description=Datasheet, ComponentLink1URL=https://www.yageo.com/upload/media/product/productsearch/datasheet/rchip/PYu-RT_1-to-0.01_RoHS_L_11.pdf, ComponentLink2Description="DigiKey Link", ComponentLink2URL=https://www.digikey.com/en/products/detail/yageo/RT0603BRD07267KL/1072399, Composition="Thin Film", Height - Seated (Max)="0.022\" (0.55mm)", lastupdated="01/10/2023 19:35:34", Lifecycle Status=Active, Minimum Order=1, Number of Terminations=2, Package / Case="0603 (1608 Metric)", Packaging=TapeAndReel, Part Number=RT0603BRD07267KL, Part Status=Active, PartId=6334, Price=0.03, Resistance="267 kOhms", Series=RT, Size / Dimension="0.063\" L x 0.031\" W (1.60mm x 0.80mm)", Supplier 1=DigiKey

## Free pads (board coordinates)
  round 6 hole 4: 1(5,5) 1(5,245) 1(245,5) 1(245,245)

## Via types
v1: diameter 0.7, hole 0.3, Top Layer to Bottom Layer, 114 vias
v2: diameter 1.27, hole 0.711, Top Layer to Bottom Layer, 2 vias

## Nets (pads, with @x,y where several pads share a name; then routed paths per layer and width w, separated by ;. In a path a pad name is that pad's centre, name@x,y a point inside that pad or via, vN(x,y) a via of type N, cw(c..) or ccw(c..) an arc to the next point about the centre after c; other vN are vias at no path point)
BST1: C1.1 IC1.2 | length 2.1
  Top Layer w0.3: IC1.2 56.575,183.575 C1.1
BST2: C6.1@195.8,180.375 IC2.2 | length 3.1
  Top Layer w0.3: IC2.2 194.475,180.075 194.775,180.375 C6.1@196.2,180.375
FB1: IC1.5 R1.1 R4.2 | length 3.1
  Top Layer w0.3: IC1.5 50.225,186.275 R1.1 R4.2
FB2: IC2.5 R6.1 R9.2 | length 3.1
  Top Layer w0.3: IC2.5 188.725,182.775 R6.1 R9.2
GND1: C2.1 C3.1 C4.2 C5.1 D1.1 IC1.4 J1.1 J2.2 R4.1 R5.1 | length 13.4
  Top Layer w0.3: v1(44.7,183.5) C4.2 ; v1(45.4,178.6) 45.4,180.475 C2.1 ; C3.1 47.2,180.475 v1(47.2,178.6) ; v1(49.7,180.4) 49.7,178.3 D1.1 ; R4.1 53.119,187.75 v1(53.127,187.758) ; IC1.4 54.675,186.375 v1(54.681,186.381) ; R5.1 58.1,185.4 v1(59.3,185.4) ; v1(76.49,169.121) 76.49,170.465 C5.1
  other v2: 88,165 14,172
GND2: C6.1@167,170.65 C7.1 C9.1 C10.1 C11.1 C12.1 C13.1 C14.2 D2.1 D3.1 IC2.4 J4.1 L3.3 R9.1 R10.1 | length 44
  Top Layer w0.3: v1(165.537,172.089) 166.839,172.089 C6.1@166.9,172.15 ; C6.1@167,172.3 167,172.15 167.037,172.113 C6.1@167.037,170.3 ; C6.1@167.4,172.15 v1(168.5,172.15) ; v1(183.2,180) C14.2 ; R9.1 190.075,184.275 191.275,184.275 v1(191.3,184.3) ; IC2.4 193.175,182.875 v1(193.181,182.881) ; R10.1 196.6,181.9 v1(197.8,181.9)
  Top Layer w0.5: L3.3 154.369,170.5 154.669,170.2 166.937,170.2 C6.1@167.037,170.3 ; v1(174.5,172.3) C7.1 v1(177.6,172.3) ; v1(183.1,177) 183.112,177.012 184.287,177.012 C10.1 ; v1(185.7,175.9) D2.1 ; v1(187.2,174) 187.2,175.6 D2.1 ; v1(187.5,177.9) D2.1 ; v1(207.9,167.2) C13.1 ; v1(212.7,169.5) C12.1 v1(215.6,169.5) ; C11.1 218.913,172.912 220.087,172.912 v1(220.1,172.9) ; v1(221,176) D3.1 222.345,177.55 v1(222.371,177.523)
  other v1: 155,161 160,161 165,161 170,161 175,161 180,161 185,161 196,161 200,161 205,161 210,161 215,161 220,161 225,161 227.5,161 196,163 155,163.5 160,163.5 165,163.5 170,163.5 175,163.5 180,163.5 185,163.5 200,163.5 205,163.5 215,163.5 220,163.5 225,163.5 227.5,163.5 155,166 160,166 165,166 175,166 180,166 185,166 195,166 200,166 205,166 210,166 220,166 225,166 227.5,166 155,168.5 160,168.5 165,168.5 175,168.5 180,168.5 185,168.5 190,168.5 225,168.5 227.5,168.5 155,171 160,171 185,171 190,171 225,171 227.5,171 190,173.5 225,173.5 227.5,173.5 205,176 224.619,177.271 205,178.5 210,178.5 200,181 205,181 210,181 195,183.5 205,183.5 210,183.5 185,186 195,186 205,186 210,186 215,186 220,186 225,186 227.5,186 185,188.5 190,188.5 195,188.5 200,188.5 205,188.5 210,188.5 215,188.5 220,188.5 225,188.5 227.5,188.5
NetC5_2: C5.2 R2.1 | length 1.7
  Top Layer w0.3: C5.2 R2.1
NetC13_2: C13.2 R7.1 | length 1.5
  Top Layer w0.3: C13.2 R7.1
NetD4_1: D4.1 J3.2 L3.2 | length 23.2
  Top Layer w0.5: J3.2@119.25,177.21 J3.2@119.7,177.21 ; J3.2 120.025,177.885 121.285,177.885 121.95,178.55 D4.1 128.65,178.55 136.7,170.5 L3.2
NetD4_2: D4.2 J3.1 L3.1 | length 21.7
  Top Layer w0.5: J3.1@119.25,182.29 J3.1@119.7,182.29 ; J3.1 123.635,182.64 124.675,181.6 125.95,181.6 D4.2 129.05,181.45 133.1,185.5 L3.1
OUT1: J2.1 L1.2 R1.2 R2.2 | length 62.7
  Top Layer w0.3: R1.2 50.05,188.65 52.2,190.8 68.4,190.8 72.85,186.35 L1.2@72.85,173.55 ; L1.2 L1.2@72.85,173.55 ; J2.1 81.54,185.54 76.55,180.55 R2.2 74.15,174.85 L1.2@72.85,173.55
OUT2: C11.2 C12.2 D3.2 J4.2 L2.2 R6.2 R7.2 | length 64.1
  Top Layer w0.3: R6.2 188.6,184.3 188.6,186.1 189.3,186.8 205.4,186.8 207.9,184.3 R7.2 ; L2.2 206.75,171.6 207.325,172.175 207.625,172.175 R7.2 ; 220.3,180.4 219.6,180.4 218.7,179.5 218.7,174.175 218.65,174.175 217.925,174.9 C12.2 214.1,174.55 213.45,173.9 209.4,173.9 207.95,172.45 R7.2 ; D3.2 221,181.505 221.325,181.83 J4.2
RCL1: IC1.3 R5.2 | length 2.6
  Top Layer w0.3: IC1.3 54.713,184.263 55.463,184.263 56.375,185.175 56.425,185.175 56.7,185.45 R5.2
RCL2: IC2.3 R10.2 | length 2.6
  Top Layer w0.3: IC2.3 193.192,180.742 193.973,180.742 194.905,181.675 194.925,181.675 195.2,181.95 R10.2
RON2: C14.1 IC2.7 | length 3.1
  Top Layer w0.3: C14.1 185.7,180.075 IC2.7
SD1: IC1.6 R3.1 | length 3.5
  Top Layer w0.3: R3.1 48.1,185 48.875,184.225 IC1.6
SW1: C1.2 D1.2 IC1.1 L1.1 | length 20.9
  Top Layer w0.3: C1.2 56.65,182.1 56.1,182.65 55.75,182.65 55.5,182.9 54.7,182.9 IC1.1 54.6,182.85 54.6,180.7 54,180.1 D1.2 54,174.7 56.2,172.5 L1.1
SW2: C6.2@195.8,179.025 D2.2 IC2.1 L2.1 | length 12
  Top Layer w0.3: L2.1@195.15,173 194.15,174 192.5,174 192.5,176.6 193.1,177.2 193.1,179.35 IC2.1 194.721,179.425 195.121,179.025 C6.2@196.2,179.025
VCC1: C4.1 IC1.7 | length 3.1
  Top Layer w0.3: C4.1 47.2,183.575 IC1.7
VCC2: IC2.6 R8.1 | length 3.5
  Top Layer w0.3: R8.1@185.55,181.5 186.6,181.5 187.375,180.725 IC2.6
VIN1: C2.2 C3.2 IC1.8 J1.2 R3.2 | length 42.1
  Top Layer w0.3: J1.2 26.1,185.4 29.625,181.875 C3.2 47.975,181.875 49.025,182.925 IC1.8 ; 43.625,181.875 43.2,182.3 43.2,184.2 44,185 R3.2
VIN2: C6.2@167,179.35 C7.2 C9.2 C10.2 IC2.8 L3.4 R8.2 | length 51.2
  Top Layer w0.3: 180.6,176.138 180.6,176.6 180.6,180.1 182,181.5 182.9,181.5 ; R8.2 182.9,181.5 ; IC2.8 187.525,179.425 186.475,178.375 183.4,178.375 183.4,178.4 182.4,179.4 182.4,181 182.9,181.5
  Top Layer w0.5: L3.4 157.4,179.35 167,179.35 169.85,179.35 171.1,178.1 175.6,178.1 C7.2 176.1,177.6 179.6,177.6 180.6,176.6 ; C9.2 180.6,176.138

## Polygon pours and split planes (outlines as drawn)
GND2 on Top Layer "GND2_L01_P017" (solid, pour order 17): 182.25,189.5 228.5,189.5 228.5,158.5 182.25,158.5
GND1 on Top Layer "GND1_L01_P001" (solid, pour order 1): 10,193 92,193 92,162 10,162
OUT2 on Top Layer "OUT2_L01_P019" (solid, pour order 19): 217.9,173.3 219.4,173.3 219.4,179.4 219.3,179.5 217.9,179.5
OUT2 on Top Layer "OUT2_L01_P016" (solid, remove dead copper, pour order 16): 208.5,168 208.5,172.75 213.25,172.75 217.9,172.75 217.9,179.3 222.5,179.3 222.5,180 228.25,180 228.25,184 210.5,184 210.5,174 208.5,174
SW2 on Top Layer "SW2_L01_P011" (solid, pour order 11): 194.2,179.5 194.2,179.3 201,179.3 201,168 192.2,168 192.2,171.7 191.2,171.7 191.2,179.4 191.1,179.5 193,179.5
GND2 on Top Layer "GND2_L01_P018" (solid, pour order 18): 148.5,172.5 178.5,172.5 178.5,174 183,174 183,158.5 148.5,158.5
VIN2 on Top Layer "VIN2_L01_P015" (solid, pour order 15): 148.75,187.5 159.75,187.5 165,182.25 181.9,182.25 181.9,175 168.75,175 164.75,179 148.75,179
SW1 on Top Layer "SW1_L01_P000" (solid, pour order 0): 55.7,183 55.7,182.8 65.3,182.8 65.3,168.9 53.7,168.9 53.7,175.2 52.7,175.2 52.7,182.9 52.6,183 54.5,183
GND2 on Bottom Layer "GND2_L02_P013" (solid, pour order 13): 148.5,189.5 228.5,189.5 228.5,158.5 148.5,158.5
GND1 on Bottom Layer "GND1_L02_P002" (solid, pour order 2): 10,193 92,193 92,162 10,162

## Silkscreen, mask and mechanical layers (free items; w line width, h text height)
Top Overlay:
  drawing of 75 lines, arcs and shapes, not listed
  text "&" at 45.2,213.4 h3.5
  text "EMC DETECTION   RECOMMENDATIONS | HOW MITAI SOLVES EMC ISSUES IN A BUCK CONVERTER?" at 4,206.243 h3
  text "2" at 142.197,195.087 h4
  text "OUT" at 94,185.022 h2
  text "VIN" at 5.002,184.5 h2
  text "VIN" at 110.302,181.7 h2
  text "OUT" at 233,181.522 h2
  text "GND" at 4.5,179.522 h2
  text "GND" at 94,179.522 h2
  text "2" at 30.197,178.087 h4
  text "GND" at 110.1,176.222 h2
  text "GND" at 233.1,176.222 h2
  text "GND Via" at 16.35,171.375 h1.52
  text "GND Via" at 76.076,164.383 h1.52
  text "1" at 53.929,163.88 h4
  text "3" at 12.793,161.153 h4
  text "ESD" at 123.5,160 h1.52
  text "Common-mode Filter" at 131,160 h1.52
  text "ESD" at 218.873,158.623 h1.52
  text "1" at 188.269,157.886 h4
  text "3" at 169.793,157.153 h4
  text "WITH MITAI" at 134,143.001 h4
  text "WITHOUT MITAI" at 18,142 h4
  text "CURRENT LOOPS" at 38,126 h4
  text "CURRENT LOOPS" at 167,126 h4
  text "1" at 14.929,125.88 h4
  text "1" at 143.929,125.88 h4
  text "RECOMMENDATION" at 167,121 h2
  text "DETECTION" at 39,120 h2
  text "The surface of the switching node is high. The fast dV/dt will provoke radiated emissions and impact the functionality of the converter" at 39,100.777 h2
  text "Change the component placement so the switching surface is small. It will reduce the unintended emissions." at 167,100.777 h2
  text "FILTERS" at 39,87 h4
  text "FILTERS" at 168,87 h4
  text "2" at 14.197,86.087 h4
  text "2" at 143.197,86.087 h4
  text "DETECTION" at 39,81 h2
  text "RECOMMENDATION" at 168,81 h2
  text "Add common-mode and differential filters to increase the board's immunity against interferences" at 168,68 h2
  text "There are no input filters. External and internal noise will affect the board´s functionality" at 39,61.777 h2
  text "3" at 14.197,44.087 h4
  text "3" at 143.197,44.087 h4
  text "STITCHING VIAS" at 39,44 h4
  text "STITCHING VIAS" at 168,44 h4
  text "DETECTION" at 40,38 h2
  text "RECOMMENDATION" at 168,38 h2
  text "High impedance between the top and bottom ground planes. It can provoke ground bouncing and instability" at 40,25 h2
  text "Add vias uniformly distributed, separated 5 - 3mm. It will reduce the ground plane impedance, reducing ground bouncing and noise" at 168,14 h2
  text "WWW.MITAI.AI" at 111.1,6.4 h3.5
Mechanical 1:
  the board outline again, w0.254
Mechanical 3:
  lines w0.254: 0,0 5,5 ; 0,250 5,245 ; 245,5 250,0 ; 245,245 250,250 ; 295,5 300,0 ; 295,245 300,250

## Dimensions
250,250 to 250,0 on Dimensions
0,250 to 250,250 on Dimensions